# EAGLE board p2grv-001 (EAGLE 9.6.2)
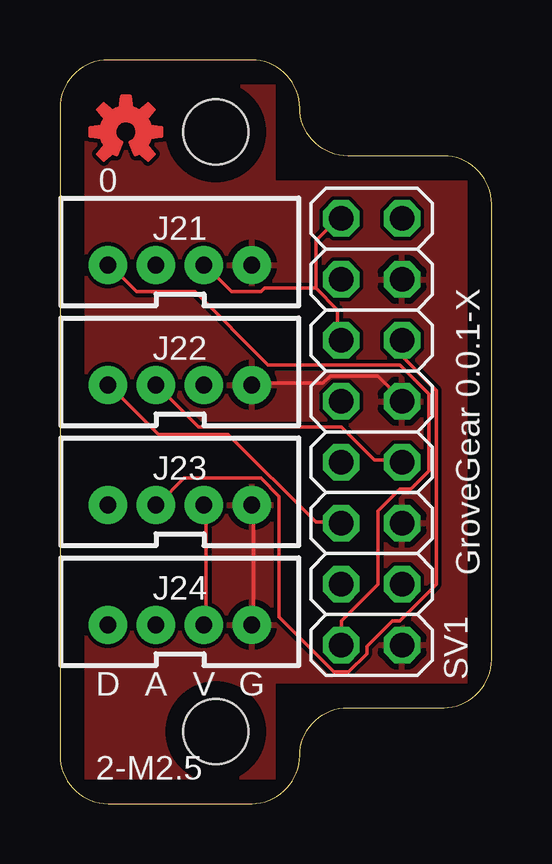
[diagram p0: board, top side]
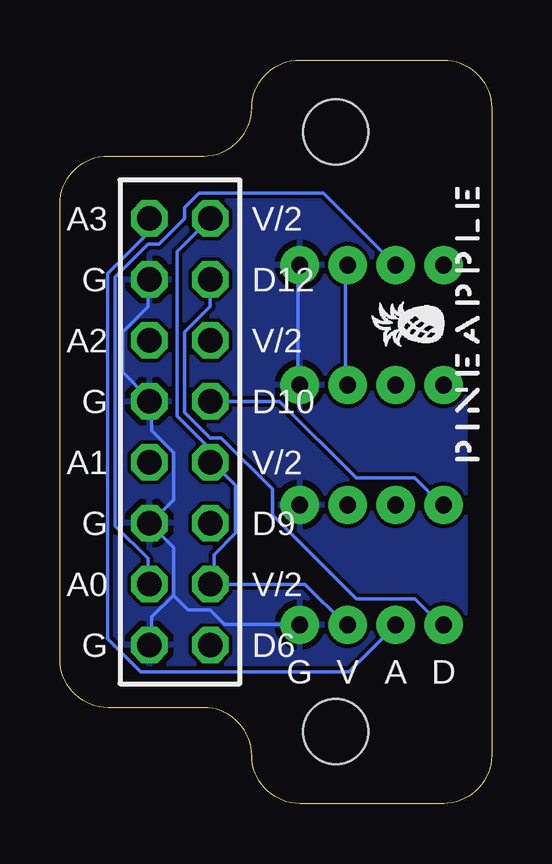
[diagram p1: board, bottom side, seen from below]

Size 18 x 31 mm. Coordinates in mm from the lower left corner, seen from the top.
Outline: 0,29 0,2 arc90 2,0 8,0 arc90 10,2 arc-90 12,4 16,4 arc90 18,6 18,25 arc90 16,27 12,27 arc-90 10,29 arc90 8,31 2,31 arc90 0,29
Copper layers (1*16): Top 0.035mm / dielectric 1.5mm / Bottom 0.035mm
Design rules "SeeedStudio_2layer_DRU_no_angle_20140221": minimum track width 6mil, minimum drill 12mil, track to track 6mil, track to pad 6mil, pad to pad 6mil, via to via 6mil, smd to smd 0mil, copper to edge 10mil, drill to drill 10mil, minimum pad ring 10mil, minimum via ring 6mil, stop-mask expansion 2mil, vias tented up to drill 100mil, thermal gap 10mil
Net classes: 0 default: width 0.152 mm, drill 0.152 mm, clearance 0.152 mm; 1 ground: width 0.305 mm, drill 0.152 mm, clearance 0.152 mm; 2 power1: width 0.508 mm, drill 0.152 mm, clearance 0.152 mm; 3 power2: width 0.61 mm, drill 0.152 mm, clearance 0.152 mm; 4 analog: width 0.305 mm, drill 0.152 mm, clearance 0.152 mm; 5 external: width 0.152 mm, drill 0.152 mm, clearance 0.152 mm
Holes 2.7 mm at 6.5,3 6.5,28
tRestrict: area 4.5,1 to 8.5,5; area 4.5,26 to 8.5,30; area 0,0 to 1,31; area 0,30 to 10,31; area 9,26 to 10,31; area 9,26 to 18,27; area 17,4 to 18,27; area 9,4 to 18,5; area 9,0 to 10,5; area 0,0 to 10,1
bRestrict: area 0,0 to 10,1; area 17,4 to 18,27; area 0,30 to 10,31; area 0,0 to 1,31; area 4.5,1 to 8.5,5; area 4.5,26 to 8.5,30; area 9,26 to 18,27; area 9,4 to 18,5; area 9,0 to 10,5; area 9,26 to 10,31

## Footprints (pad centres in the part's own frame; a part is rotated, then mirrored left to right if it is on the bottom)
JST-4-PTH-VERT = drill 0.7 pad 1.6: 1 -3,-0.55; 2 -1,-0.55; 3 1,-0.55; 4 3,-0.55
2X08 = drill 1.016 octagon: 1 -8.89,-1.27; 2 -8.89,1.27; 3 -6.35,-1.27; 4 -6.35,1.27; 5 -3.81,-1.27; 6 -3.81,1.27; 7 -1.27,-1.27; 8 -1.27,1.27; 9 1.27,-1.27; 10 1.27,1.27; 11 3.81,-1.27; 12 3.81,1.27; 13 6.35,-1.27; 14 6.35,1.27; 15 8.89,-1.27; 16 8.89,1.27

## Placement (x,y rotation side)
J21  [JST-4-PTH-VERT]  5,23 0 top
J22  [JST-4-PTH-VERT]  5,18 0 top
J23  [JST-4-PTH-VERT]  5,13 0 top
J24  [JST-4-PTH-VERT]  5,8 0 top
LOGO1  OSHW-LOGOS-COPPER  [OSHW-LOGO-S_COPPER]  2.75,28 0 top
SV1  [2X08]  13,15.5 90 top
U$1  PINEAPPLE450_SILK  [PINEAPPLE450_SILK]  0.5,20 90 bottom

## Library data of the parts
J21-J24 = SparkFun-Connectors; PROD_ID: CONN-13251
LOGO1 = SparkFun-Aesthetics
SV1 = pinhead
U$1 = pineapple

## Nets
ANLG0: J21.2 SV1.3
ANLG1: J22.2 SV1.7
ANLG2: J23.2 SV1.11
ANLG3: J24.2 SV1.15
DTCT0: J21.1 SV1.2
DTCT1: J22.1 SV1.6
DTCT2: J23.1 SV1.10
DTCT3: J24.1 SV1.14
GND: J21.4 J22.4 J23.4 J24.4 SV1.1 SV1.5 SV1.9 SV1.13
VCC: J21.3 J22.3 J23.3 J24.3 SV1.4 SV1.8 SV1.12 SV1.16

## Tracks (layer width: path | path; a pad name or v marks a point on that pad's centre or on a via)
ANLG0
  Bottom 0.152: SV1.3 14.33,9.3 14.33,10.21 15.7,11.58 15.7,21.95 14.33,23.32 13.87,23.32 12.8,24.38 12.8,24.84 12.19,25.45 7.01,25.45 4.12,22.55 J21.2
ANLG1
  Top 0.152: SV1.7 14.17,14.33 13.11,14.33 11.73,15.7 5.79,15.7 4.12,17.37 J22.2
ANLG2
  Top 0.152: SV1.11 14.33,19.2 14.33,18.59 15.7,17.22 15.7,9.14 14.17,7.62 13.87,7.62 12.8,6.55 12.8,6.25 12.04,5.49 11.43,5.49 9.14,7.77 9.14,12.8 8.38,13.56 5.18,13.56 4.12,12.5 J23.2
ANLG3
  Bottom 0.152: SV1.15 14.33,24.38 14.33,23.77 16,22.1 16,6.86 14.63,5.49 5.94,5.49 4.12,7.32 J24.2
DTCT0
  Top 0.152: SV1.2 11.73,6.71 11.73,7.62 13.26,9.14 13.26,12.19 14.17,13.11 14.63,13.11 15.39,13.87 15.39,17.07 14.17,18.29 8.69,18.29 5.64,21.34 3.2,21.34 2.13,22.4 J21.1
DTCT1
  Top 0.152: SV1.6 11.58,11.73 10.67,11.73 7.01,15.39 4.12,15.39 2.13,17.37 J22.1
DTCT2
  Bottom 0.152: SV1.10 11.58,16.76 8.84,16.76 5.64,13.56 3.2,13.56 2.13,12.5 J23.1
DTCT3
  Bottom 0.152: SV1.14 11.73,21.79 11.73,20.73 12.8,19.66 12.8,16.31 11.73,15.24 11.28,15.24 9.14,13.11 9.14,12.04 5.64,8.53 3.2,8.53 2.13,7.47 J24.1
GND
  Top 0.152: J24.4 8.08,7.47 8.08,12.34 J23.4 | J22.4 8.08,17.53 10.97,17.53 11.28,17.83 13.26,17.83 14.17,16.92 SV1.9
  Bottom 0.152: J22.4 8.08,17.53 8.08,22.4 J21.4 | 13.26,8.69 14.17,7.77 14.17,6.71 SV1.1 | 13.26,8.69 13.26,10.67 14.17,11.58 SV1.5 14.17,11.73 13.26,12.65 13.26,14.63 14.17,15.54 14.17,16.76 SV1.9 14.33,16.92 15.39,17.98 15.39,19.66 14.33,20.73 14.33,21.79 SV1.13 | 13.26,8.69 12.65,8.08 11.73,8.08 11.12,7.47 8.08,7.47 J24.4
  pour Top: -1,-1 19,-1 19,32 -1,32
  pour Bottom: -2,-2 20,-2 20,33 -2,33
VCC
  Top 0.152: J24.3 6.1,7.47 6.1,12.34 J23.3 | 10.67,21.49 11.58,20.57 11.58,19.36 SV1.12 | 10.67,21.49 10.67,23.47 11.58,24.38 SV1.16 | 10.67,21.49 8.53,21.49 8.38,21.34 7.16,21.34 6.1,22.4 J21.3
  Bottom 0.152: J24.3 6.1,7.47 7.77,9.14 11.58,9.14 SV1.4 11.58,9.3 11.58,10.36 10.67,11.28 10.67,13.26 11.58,14.17 SV1.8 11.73,14.33 11.73,14.78 13.11,16.15 13.11,23.01 SV1.16 | J22.3 6.1,17.53 6.1,22.4 J21.3

## Text on the board
tNames: 0 | GroveGear 0.0.1-X | D | A | V | G | 2-M2.5
bNames: V/2 | A3 | D12 | G | V/2 | A2 | D10 | G | V/2 | A1 | D9 | G | V/2 | A0 | D6 | G | D | A | V | G